# Altium PCB PCB1.PcbDoc
Units mm, origin at the board's own origin, x right, y up, seen from the top; angles counter-clockwise.
Board outline 43.05 x 55.55 mm, 4 copper layers (SignalTop, Ground, Power, SingalBottom), stack 1.566 mm thick; 65 components, 56 nets, 231 pads, 112 vias.
Unrouted connection lines stored in the file: 3.
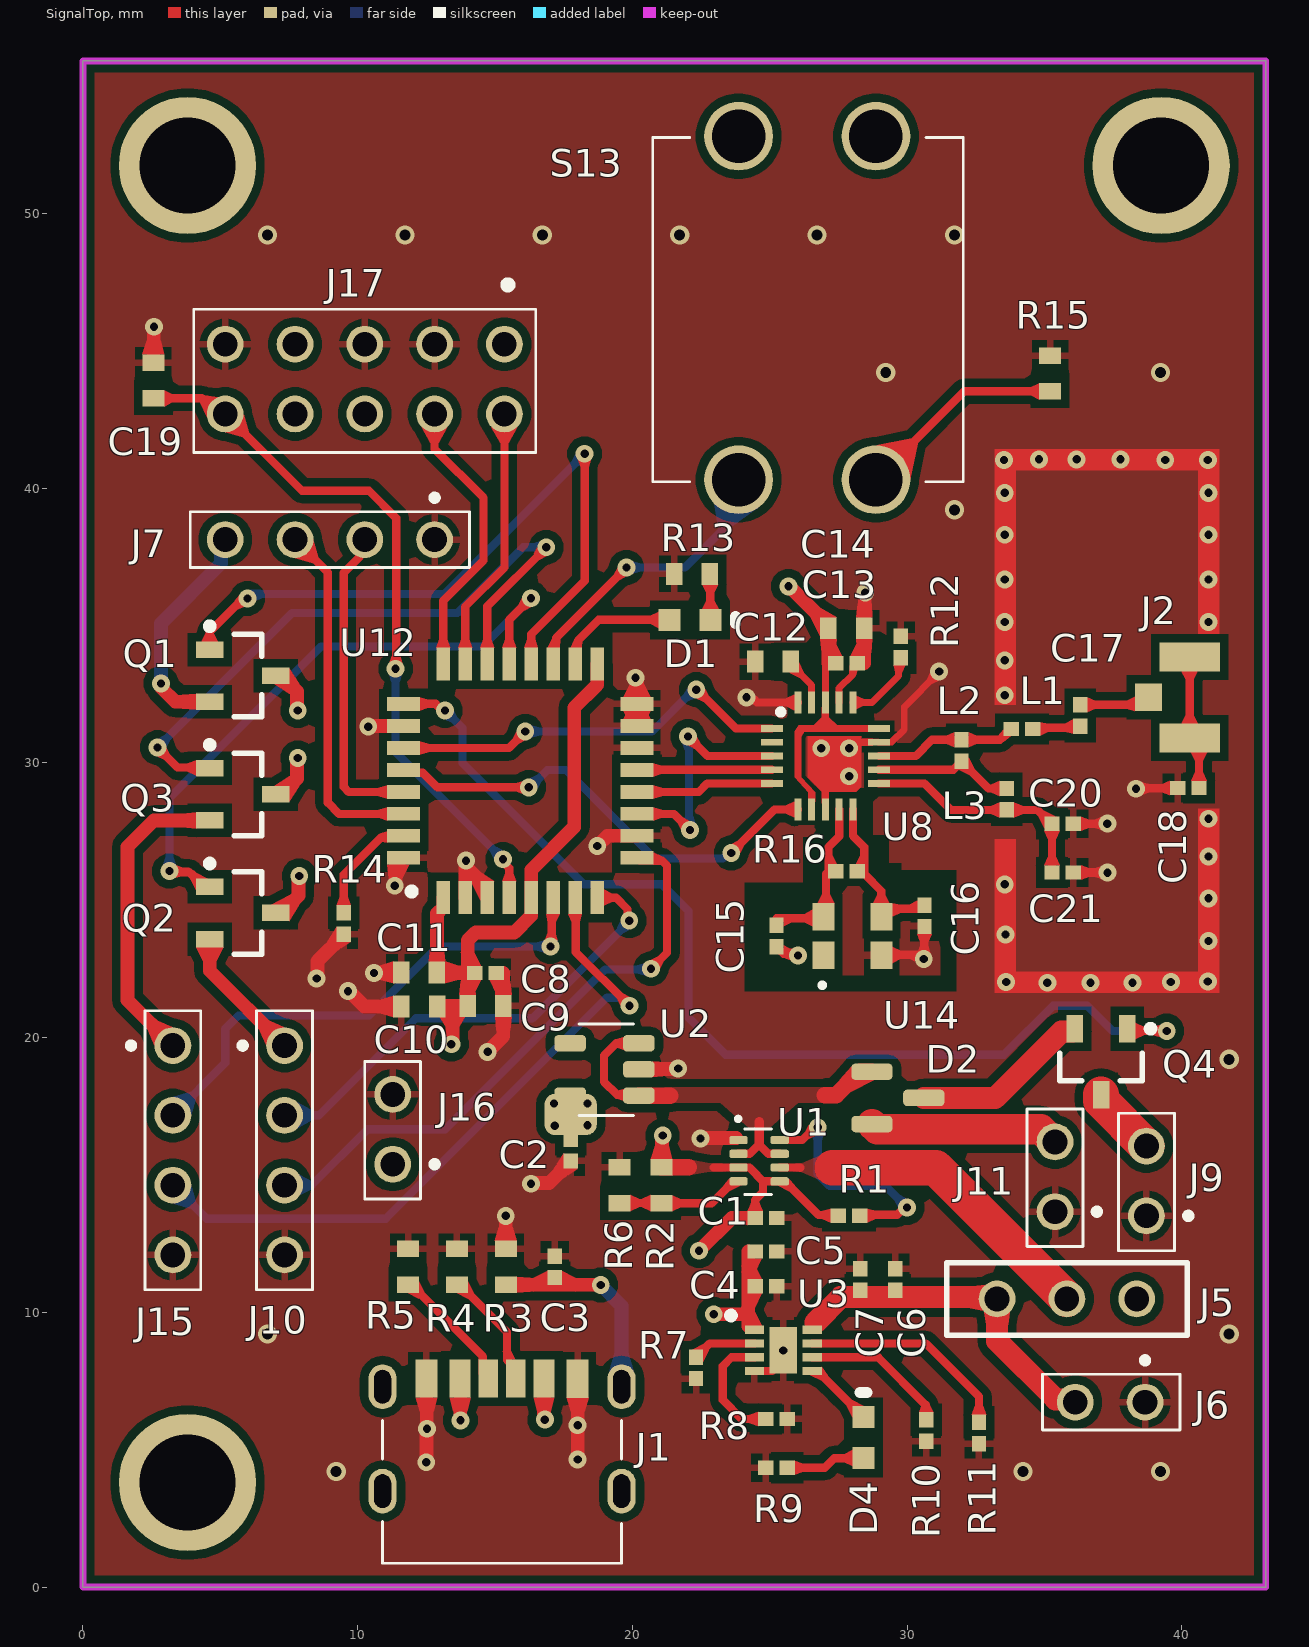
[diagram p0: SignalTop view]
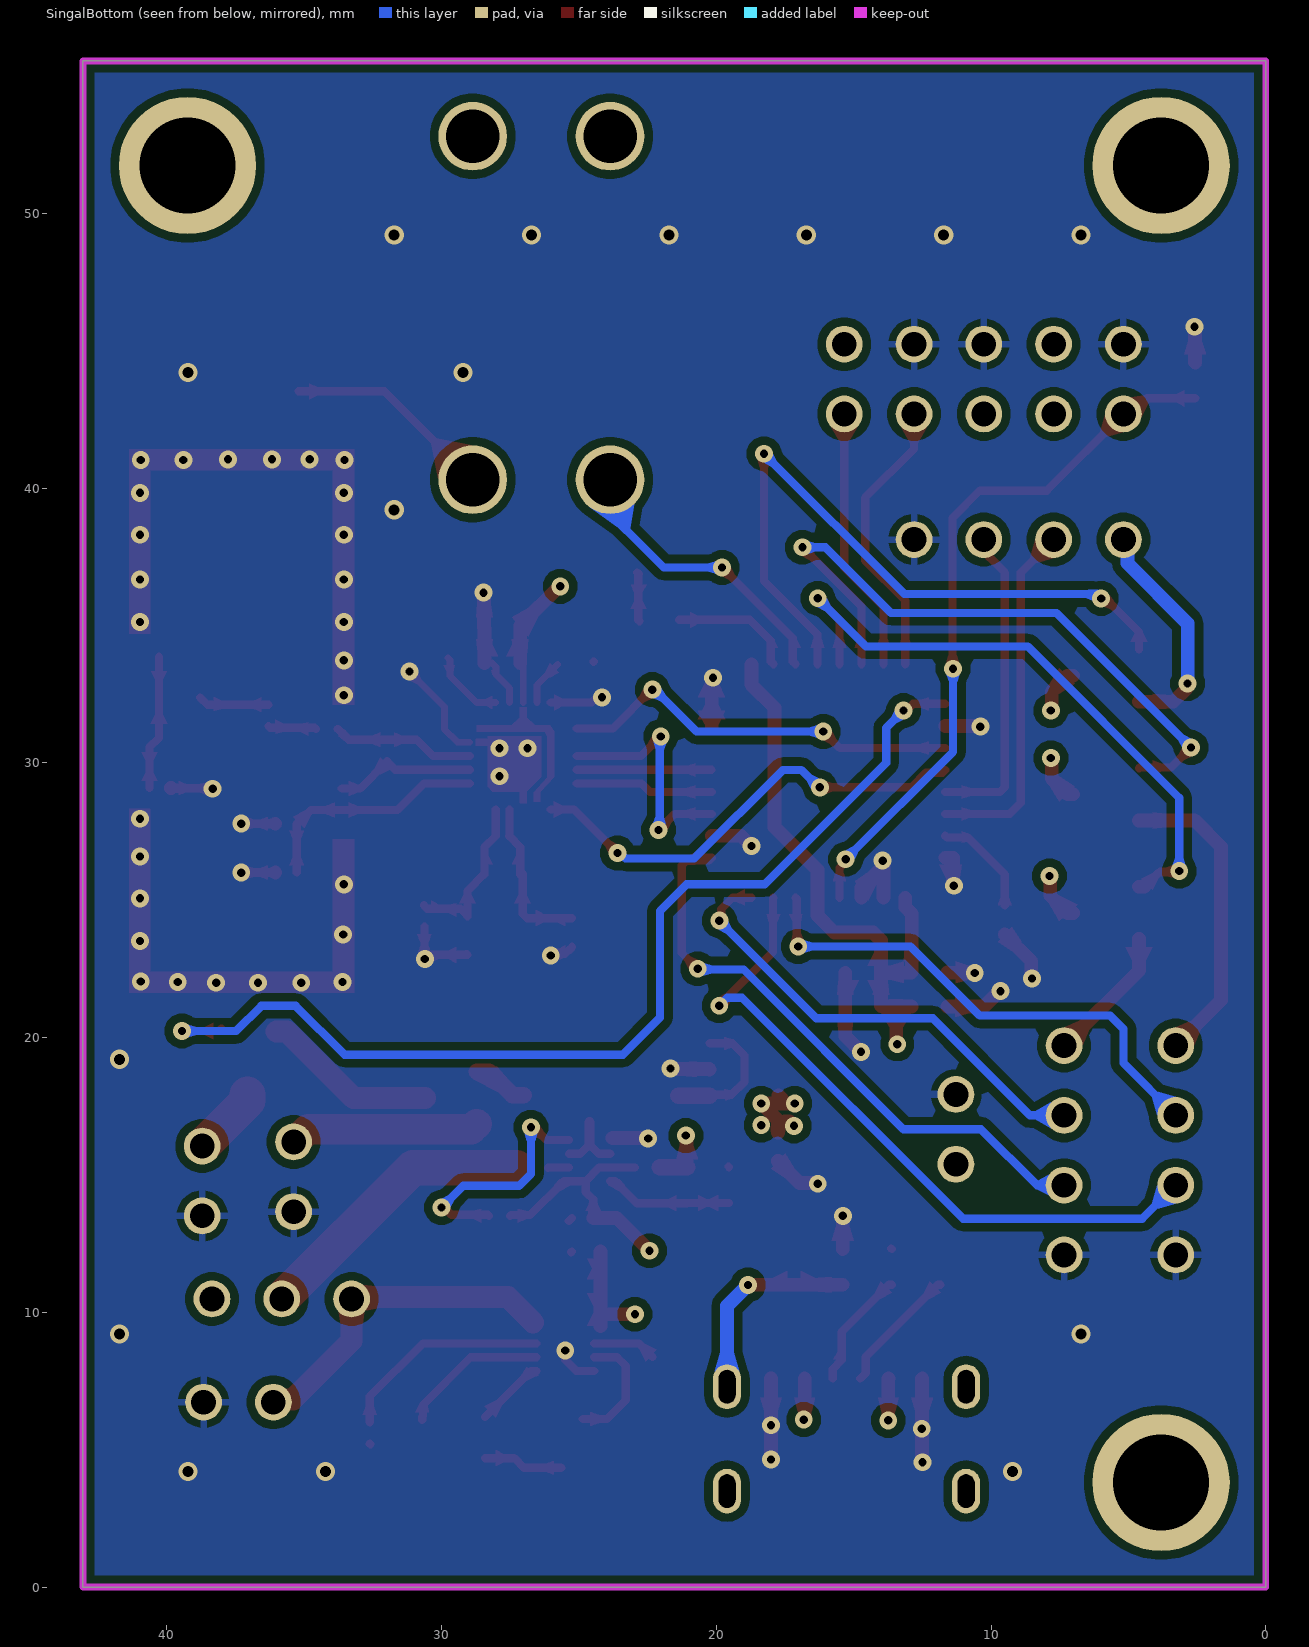
[diagram p1: SingalBottom view, seen from below]
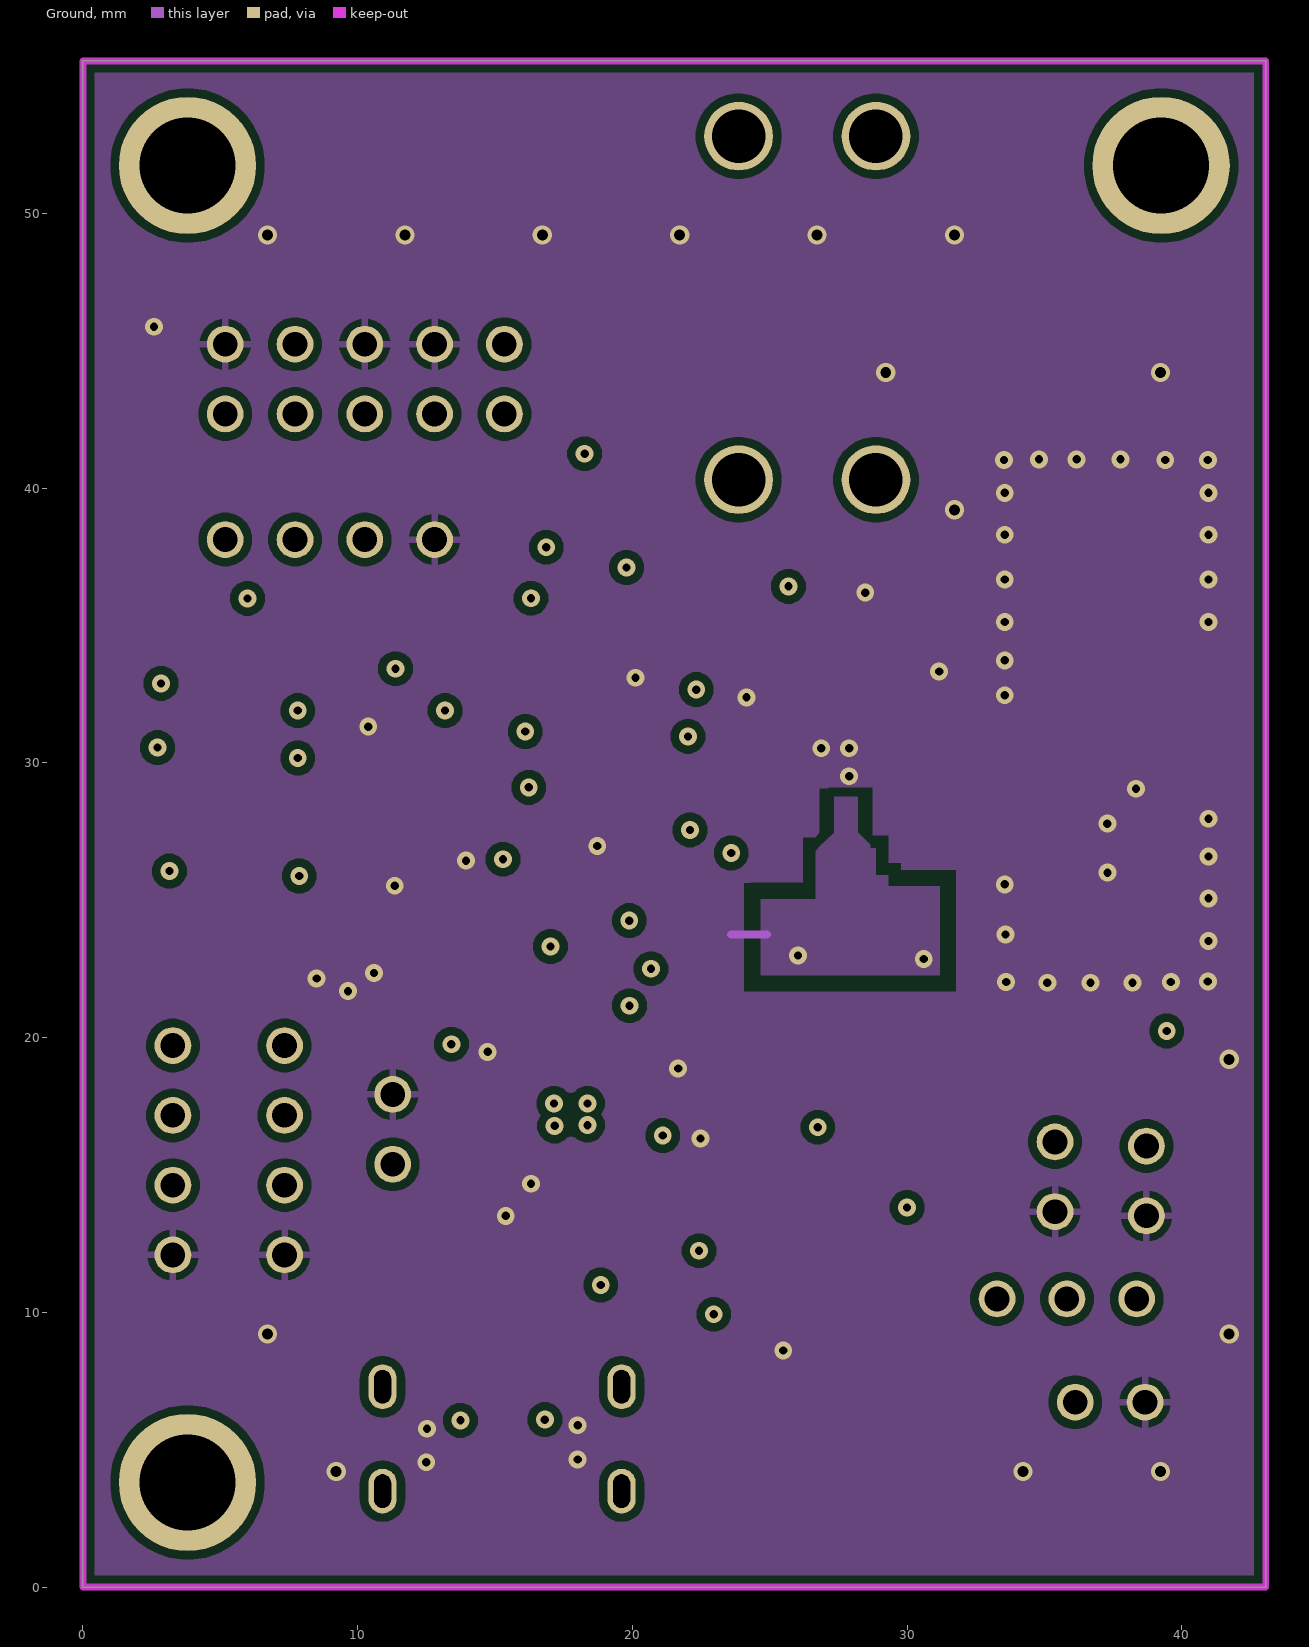
[diagram p2: Ground]
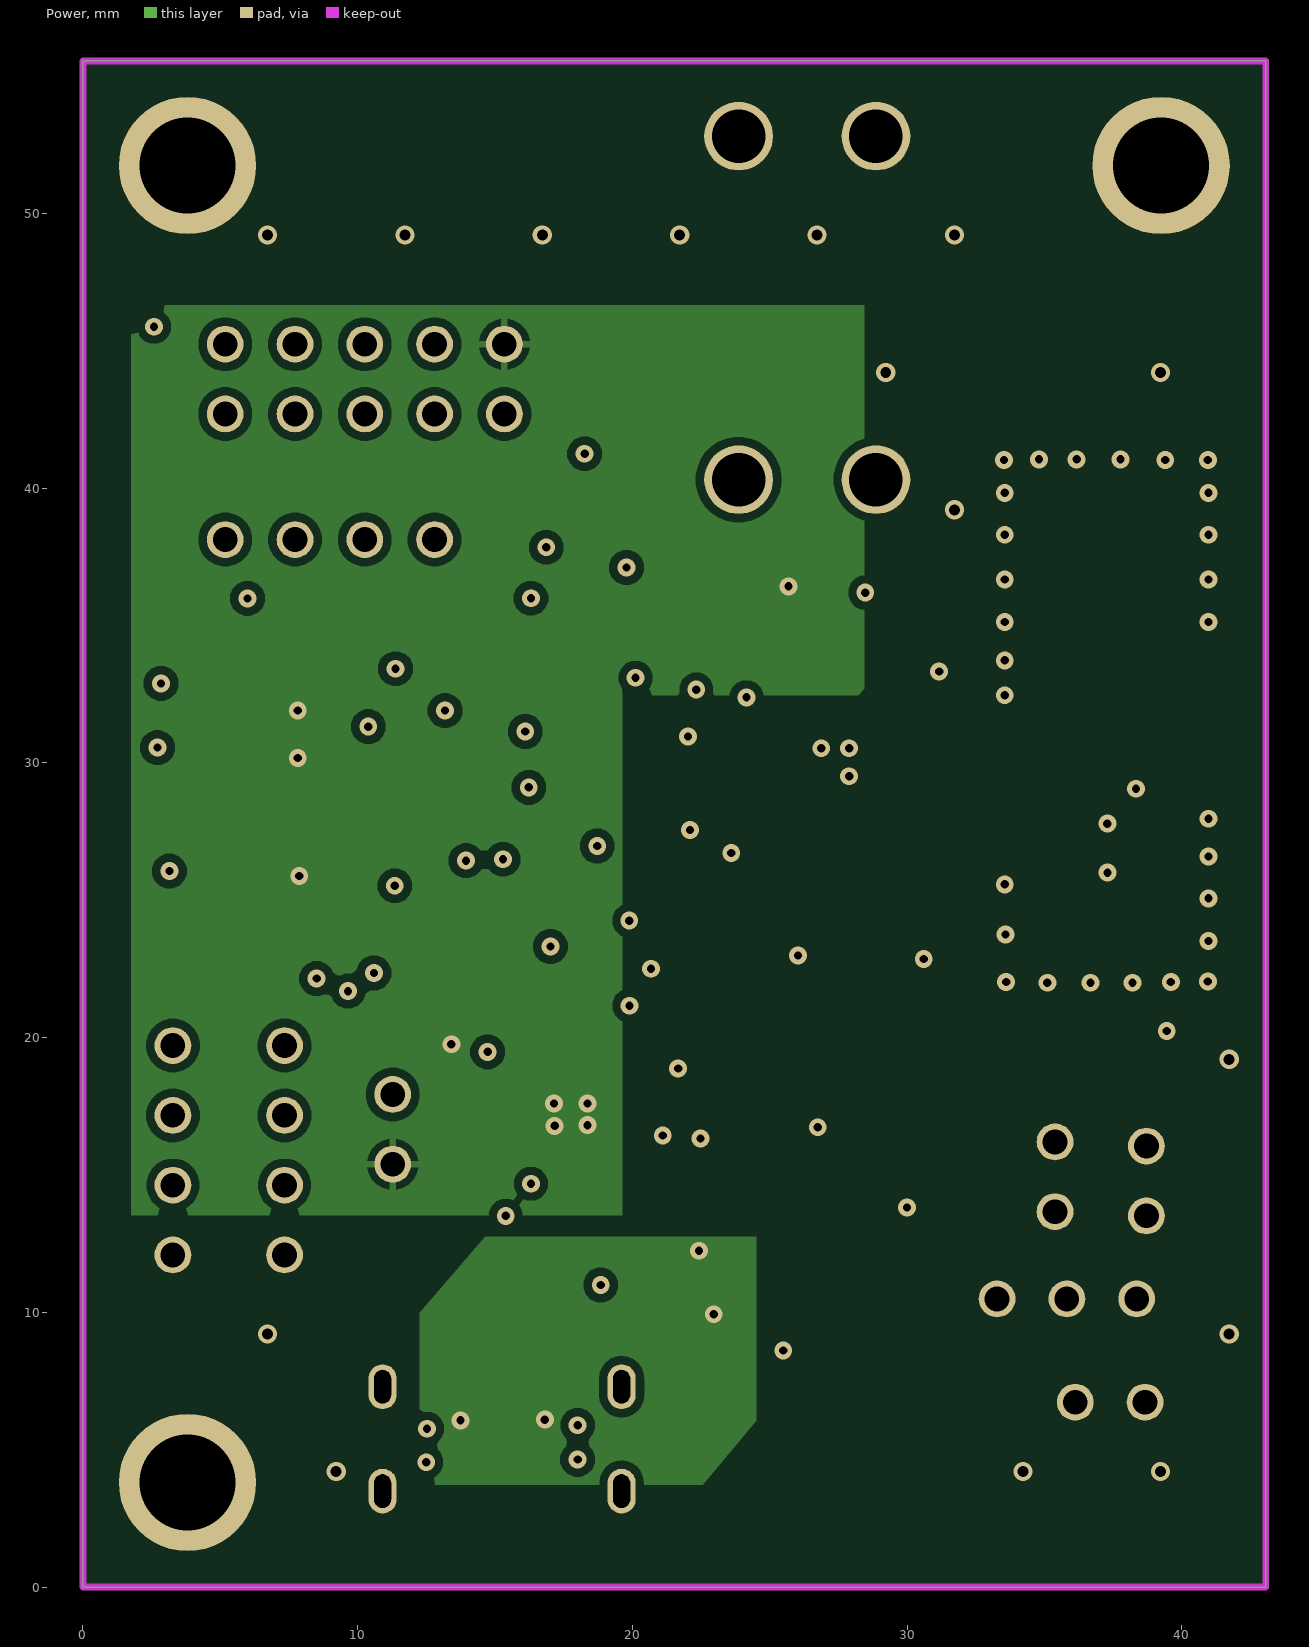
[diagram p3: Power]

## Layer stack, top to bottom
Top Solder: solder mask 0.03, Solder Resist, Dk 3.8
SignalTop: signal copper 0.035
Dielectric 2: prepreg 0.203, PP-022, Dk 4.4
Ground: signal copper 0.03
Dielectric 1: core 1.03, FR-4, Dk 4.6
Power: signal copper 0.03
Dielectric 3: prepreg 0.203, PP-022, Dk 4.4
SingalBottom: signal copper 0.035
Bottom Solder: solder mask 0.03, Solder Resist, Dk 3.8

## Board outline
0,0 0,55.55 43.053,55.55 43.053,0

## Design rules (kind name [scope] priority, off if disabled: settings)
Clearance Clearance_Silk [IsPad vs (OnLayer('Top Overlay'))] p1: gap=0.15 ignorepadtopadclearanceinfootprint=FALSE
Clearance Clearance_ViaToTrack [IsVia vs IsPad] p2: gap=0.2 ignorepadtopadclearanceinfootprint=FALSE
Clearance Clearance_HTH [IsVia vs IsVia] p3: gap=0 ignorepadtopadclearanceinfootprint=FALSE
Clearance ClearanceNRF [InComponent('U8')] p4: gap=0.15 ignorepadtopadclearanceinfootprint=FALSE
Clearance ClearanceU1 [(InComponent('U1') AND InNet('GND')) vs InNamedPolygon('NETD2_1_L01_P000')] p5: gap=0.05 ignorepadtopadclearanceinfootprint=TRUE
Clearance ClearanceU1_1 [(InComponent('U1') AND InNet('NetR1_2')) vs InNamedPolygon('NETD2_1_L01_P000')] p6: gap=0.05 ignorepadtopadclearanceinfootprint=TRUE
Clearance ClearanceU1_2 [InNet('NetD2_1') vs InNamedPolygon('NETD2_1_L01_P000')] p7: gap=0.01 ignorepadtopadclearanceinfootprint=TRUE
Clearance Clearance_AC_IN [InNetClass('AC_IN')] p8: gap=2 ignorepadtopadclearanceinfootprint=FALSE
Clearance Clearance_OTWORY_MONTAZOWE [InPadClass('OTWORY_MONTAZOWE')] p9: gap=0.3 ignorepadtopadclearanceinfootprint=FALSE
Clearance Clearance_POLYGON [InPolygon] p10: gap=0.3 ignorepadtopadclearanceinfootprint=FALSE
Clearance Clearance_KEEPOUT_ELECTRICAL [OnLayer('Keep-Out Layer')] p11: gap=0.25 ignorepadtopadclearanceinfootprint=FALSE
Clearance [All] p12: gap=0.178 ignorepadtopadclearanceinfootprint=FALSE
HoleSize [All] p1: absolutevalues=TRUE maxlimit=4 minlimit=0.025 maxpercent=80.000 minpercent=20.000
HoleToHoleClearance [All] p1: gap=0.127 allowstackedmicrovias=TRUE
MinimumSolderMaskSliver [All] p1: minsoldermaskwidth=0.076
PolygonConnect PolygonConnect_C61 [InNet('NetC6_1')] p1: thpad.connectstyle=Relief thpad.reliefconductorwidth=0.254 thpad.reliefentries=4 thpad.polygonreliefangle="90 Angle" thpad.airgapwidth=0.254 smdpad.connectstyle=Direct smdpad.reliefconductorwidth=0.254 smdpad.reliefentries=4 smdpad.polygonreliefangle="90 Angle" smdpad.airgapwidth=0.254 via.connectstyle=Relief via.reliefconductorwidth=0.254 via.reliefentries=4 via.polygonreliefangle="90 Angle" via.airgapwidth=0.254
PolygonConnect PolygonNETD21 [(InComponent('U2') AND InNet('NetD2_1')) vs InNamedPolygon('NETD2_1_L01_P000')] p2: thpad.connectstyle=Relief thpad.reliefconductorwidth=0.254 thpad.reliefentries=4 thpad.polygonreliefangle="90 Angle" thpad.airgapwidth=0.254 smdpad.connectstyle=Direct smdpad.reliefconductorwidth=0.254 smdpad.reliefentries=4 smdpad.polygonreliefangle="90 Angle" smdpad.airgapwidth=0.254 via.connectstyle=Relief via.reliefconductorwidth=0.254 via.reliefentries=4 via.polygonreliefangle="90 Angle" via.airgapwidth=0.254
PolygonConnect [All] p3: thpad.connectstyle=Relief thpad.reliefconductorwidth=0.5 thpad.reliefentries=4 thpad.polygonreliefangle="90 Angle" thpad.airgapwidth=0.254 smdpad.connectstyle=Relief smdpad.reliefconductorwidth=0.254 smdpad.reliefentries=4 smdpad.polygonreliefangle="90 Angle" smdpad.airgapwidth=0.254 via.connectstyle=Direct via.reliefconductorwidth=0.254 via.reliefentries=4 via.polygonreliefangle="90 Angle" via.airgapwidth=0.254
RoutingVias RoutingVias_POWER [InNetClass('POWER')] p1: holewidth=0.4 width=0.7 viastyle="Through Hole" minholewidth=0.3 minwidth=0.65 maxholewidth=0.6 maxwidth=1.1
RoutingVias [All] p2: holewidth=0.3 width=0.65 viastyle="Through Hole" minholewidth=0.3 minwidth=0.65 maxholewidth=0.4 maxwidth=0.75
SilkToSilkClearance [All] p1: silktosilkclearance=0.127
SilkToSolderMaskClearance [IsPad] p1: minsilkscreentomaskgap=0.127 clearancetoexposedcopper=TRUE
SolderMaskExpansion [All] p1: expansion=0.102 istentingtop=FALSE
UnRoutedNet [All] p1: checkbadconnections=TRUE
Width Width_BATTCHG [All] p1: maxlimit=3 minlimit=0.1 preferedwidth=0.8
Width Width_PELT [InNetClass('PELT')] p2: maxlimit=3 minlimit=2 preferedwidth=2.5
Width Width_POWER [InNetClass('POWER5V')] p3: maxlimit=0.5 minlimit=0.254 preferedwidth=0.5
Width [All] p4: maxlimit=0.3 minlimit=0.254 preferedwidth=0.3
24 further rules are at their usual default settings.

## Components (designator, comment, footprint, x,y, rotation, side; value= is the part's Value field where it differs from the comment)
C1 "1u" 0402 24.867,13.437 r0 top value="10,000 pF"
C2 "1u" 0402 17.755,15.9 r270 top value="10,000 pF"
C3 "10n" 0402 17.17,11.659 r90 top value="10,000 pF"
C4 "10n" 0402 24.867,10.947 r0 top value="10,000 pF"
C5 "1u" 0402 24.867,12.217 r0 top value="10,000 pF"
C6 "1u" 0402 29.566,11.201 r90 top value="10,000 pF"
C7 "10n" 0402 28.296,11.201 r90 top value="10,000 pF"
C8 "1u" 0402 14.654,22.352 r0 top value="10,000 pF"
C9 "100n" 0603 14.654,21.158 r0 top value="10,000 pF"
C10 "100n" 0603 12.245,21.133 r180 top value="10,000 pF"
C11 "100n" 0603 12.238,22.375 r180 top value="10,000 pF"
C12 "33n" 0603 25.121,33.68 r180 top value="10,000 pF"
C13 "1u" 0402 27.788,33.63 r180 top value="10,000 pF"
C14 "100n" 0603 27.788,34.9 r180 top value="10,000 pF"
C15 "22p" 0402 25.248,23.698 r270 top value="10,000 pF"
C16 "22p" 0402 30.632,24.435 r270 top value="10,000 pF"
C17 "1p5" 0402 36.297,31.725 r270 top value="10,000 pF"
C18 "1p" 0402 40.234,29.083 r180 top value="10,000 pF"
C19 "100n" 0603 2.565,43.917 r90 top value="10,000 pF"
C20 "2n2" 0402 35.662,27.788 r0 top value="10,000 pF"
C21 "4p7" 0402 35.662,26.01 r0 top value="10,000 pF"
D1 "LED" LIGHT_DIODE 22.098,35.204 r0 top
D2 "DUO_DIODE" DUO_DIODE 29.663,17.807 r0 top
D4 "LIGHT_DIODE" LIGHT_DIODE 28.415,5.442 r90 top (schematic designator U4)
J1 "USBC" USB_C 15.257,5.543 r0 top
J2 "UFL_ANTENA" UFL_ANTENA 39.534,32.383 r270 top
J5 "SWITCH3PIN" SWITCH 35.814,10.49 r0 top (schematic designator U5)
J6 "BATT_CONN" 2_54X2 37.389,6.731 r180 top (schematic designator U6)
J7 "I2C_CONN" 2_54X4 8.992,38.125 r180 top (schematic designator U7)
J9 "PETLIER_TEC" 2_54X2 38.71,14.783 r90 top (schematic designator U9)
J10 "GPS_CONN" 2_54X4 7.341,15.9 r270 top (schematic designator U10)
J11 "PETLIER_TEG" 2_54X2 35.382,14.935 r90 top (schematic designator U11)
J15 "ADC_CONN" 2_54X4 3.277,15.9 r270 top (schematic designator U15)
J16 "VCC_CONN" 2_54X2 11.278,16.662 r90 top (schematic designator U16)
J17 "SWD2x5" SWD2X5 10.262,43.967 r270 top (schematic designator U17)
L1 "3n9" 0402 34.177,31.229 r0 top
L2 "8n2" 0402 31.979,30.455 r270 top
L3 "2n7" 0402 33.63,28.677 r270 top
Q1 "PMOS" SOT95P245X112-3N 5.817,33.172 r0 top
Q2 "PMOS" SOT95P245X112-3N 5.817,24.536 r0 top
Q3 "PMOS" SOT95P245X112-3N 5.817,28.854 r0 top
Q4 "PMOS" SOT95P245X112-3N 37.059,19.126 r270 top
R1 "10k" 0402 27.889,13.513 r0 top
R2 "1k" 0603 21.057,14.63 r90 top
R3 "1M" 0603 15.392,11.659 r270 top
R4 "5.1k" 0603 13.614,11.659 r270 top
R5 "5.1k" 0603 11.836,11.659 r270 top
R6 "2k" 0603 19.533,14.63 r270 top
R7 "600" 0402 22.319,7.982 r90 top
R8 "10k" 0402 25.248,6.121 r180 top
R9 "10k" 0402 25.248,4.343 r0 top
R10 "15k" 0402 30.701,5.696 r90 top
R11 "15k" 0402 32.614,5.613 r90 top
R12 "22k" 0402 29.769,34.214 r270 top
R13 "2k2" 0603 22.174,36.881 r0 top
R14 "10k" 0402 9.5,24.155 r270 top
R15 "1M" 0603 35.204,44.171 r90 top
R16 "22k" 0402 27.788,26.06 r0 top
S13 "FSM100" FSM100 26.365,46.558 r90 top (schematic designator U13)
U1 "TPS2117" TPS2117 24.613,15.519 r0 top
U2 "ADP160" ADP160 18.986,18.843 r180 top
U3 "BQ25172DSGR" BQ25172 25.494,8.617 r0 top
U8 "nRF24L01P" NRF24L01P 27.026,30.251 r0 top
U12 "STM32L071KBT6" STM32L0 15.918,29.343 r0 top
U14 "OSCILATOR" OSCILATOR 28.016,23.698 r0 top

## Footprints (in the part's own frame and the unit in brackets; to place one, negate y for a bottom-side part, rotate by r counter-clockwise, add the part's x,y. Pads: shape width x height; smd on the part's side, far side on the other; paste and mask are expansions set on the pad)
2_54X2 [mm]
  round 1.34 hole 0.9: 1(-1.27,0) 2(1.27,0)
  silkscreen extent -2.54,-1.62 2.47,1.02
2_54X4 [mm]
  round 1.34 hole 0.9: 1(-3.81,0) 2(-1.27,0) 3(1.27,0) 4(3.81,0)
  silkscreen extent -5.08,-1.62 5.08,1.02
0402 [mm]
  rect 0.56x0.52 smd: 1(-0.39,0) 2(0.39,0)
  body extent -0.53,-0.27 0.53,0.28, height 0.55
0603 [mm] "Chip Capacitor, 2-Leads, Body 1,00x0,50mm, IPC Medium Density"
  rect 0.6x0.8 smd: 1(-0.65,0) 2(0.65,0)
  body extent -0.85,-0.45 0.85,0.45, height 0.55
ADP160 [mm]
  rrect50% 1.15x0.6 smd: 1(-1.25,0.95) 2(-1.25,0) 3(-1.25,-0.95) 4(1.25,0.95) 5(1.25,-0.95)
  silkscreen extent -1.05,-1.65 0.92,1.68
BQ25172 [mm]
  rect 0.7x0.3 smd: 1(-1.05,0.75) 2(-1.05,0.25) 3(-1.05,-0.25) 4(-1.05,-0.75) 5(1.05,-0.75) 6(1.05,-0.25) 7(1.05,0.25) 8(1.05,0.75)
  rect 1x1.7 smd: 4(0,0)
  silkscreen extent -2.03,1.15 -1.78,1.39
DUO_DIODE [mm]
  rrect50% 1.5x0.6 smd: 1(-0.944,0.953) 2(-0.944,-0.953) 3(0.944,-0.002)
FSM100 [mm]
  round 2.5 hole 1.95: 1(-6.25,2.5) 2(6.25,2.5) 3(-6.25,-2.5) 4(6.25,-2.5)
  silkscreen extent -6.32,-5.68 6.2,5.63
LIGHT_DIODE [mm]
  rect 0.8x0.8 smd: 1(-0.75,0) 2(0.75,0)
  silkscreen extent 1.65,-0.13 1.65,0.13, body extent -0.8,-0.4 0.8,0.4, height 0.9
NRF24L01P [mm]
  rect 0.8x0.25 smd: 1(-1.95,1) 2(-1.95,0.5) 3(-1.95,0) 4(-1.95,-0.5) 5(-1.95,-1) 11(1.95,-1) 12(1.95,-0.5) 13(1.95,0) 14(1.95,0.5) 15(1.95,1)
  rect 0.25x0.8 smd: 6(-1,-1.95) 7(-0.5,-1.95) 8(0,-1.95) 9(0.5,-1.95) 10(1,-1.95) 16(1,1.95) 17(0.5,1.95) 18(0,1.95) 19(-0.5,1.95) 20(-1,1.95)
  SignalTop region: -0.125,-1.725 0.125,-1.725 0.125,-1.55 0.125,-1.5 0.125,-1.125 -0.125,-1.275
  SignalTop region: -0.875,0.7 -0.775,0.875 -0.775,1.125 -0.975,1.125 -1.125,0.9 -1.125,0.7
  SignalTop region: 1.3,0.725 1.3,-1.125 1.125,-1.3 -0.125,-1.3 -0.65,-0.775 -0.65,-0.75 -0.65,0.725
  SignalTop region: -0.625,-1.325 -0.375,-1.325 -0.875,-0.775 -1.125,-0.775
  SignalTop region: -1.125,-0.775 -1.125,0.7 -0.875,0.7 -0.875,-0.775
  SignalTop region: -0.625,-1.325 -0.625,-1.675 -0.375,-1.675 -0.375,-1.325
  SignalTop region: -0.125,1.1 -0.125,1.775 0.125,1.775 0.125,1.1
  SignalTop region: 0.375,1.1 0.45,1.1 0.125,1.4 0.125,1.1
  SignalTop region: -0.375,1.1 -0.45,1.1 -0.125,1.4 -0.125,1.1
  SignalTop region: 1.7,0.875 -0.775,0.875 -0.775,1.125 1.7,1.125
  SignalTop region: 1.725,0.375 1.725,0.625 1.55,0.625 1.5,0.625 1.125,0.625 1.275,0.375
  SignalTop lines w0.25: 0,1.95 0,1.95
  silkscreen extent -1.68,1.54 -1.57,1.66
OSCILATOR [mm]
  rect 0.8x1 smd: 1(-1.054,-0.699) 2(1.054,-0.699) 3(1.054,0.699) 4(-1.054,0.699)
  silkscreen extent -1.13,-1.82 -1.08,-1.77
SOT95P245X112-3N [mm] "SOT23, 3-Leads, Body 2,90x2,45mm, Pitch 0,95mm, IPC Medium Density"
  rect 1x0.6 smd: 1(-1.2,0.95) 2(-1.2,-0.95) 3(1.2,0)
  silkscreen extent -1.32,-1.5 0.7,1.92, body extent -0.7,-1.5 0.7,1.5, height 1.12
STM32L0 [mm]
  rect 0.5x1.2 smd: 1(-2.8,-4.25) 2(-2,-4.25) 3(-1.2,-4.25) 4(-0.4,-4.25) 5(0.4,-4.25) 6(1.2,-4.25) 7(2,-4.25) 8(2.8,-4.25) 17(2.8,4.25) 18(2,4.25) 19(1.2,4.25) 20(0.4,4.25) 21(-0.4,4.25) 22(-1.2,4.25) 23(-2,4.25) 24(-2.8,4.25)
  rect 1.2x0.5 smd: 9(4.25,-2.8) 10(4.25,-2) 11(4.25,-1.2) 12(4.25,-0.4) 13(4.25,0.4) 14(4.25,1.2) 15(4.25,2) 16(4.25,2.8) 25(-4.25,2.8) 26(-4.25,2) 27(-4.25,1.2) 28(-4.25,0.4) 29(-4.25,-0.4) 30(-4.25,-1.2) 31(-4.25,-2) 32(-4.25,-2.8)
  silkscreen extent -4.06,-4.13 -3.84,-3.92
SWD2X5 [mm]
  round 1.34 hole 0.9: 1(-1.27,5.08) 2(1.27,5.08) 3(-1.27,2.54) 4(1.27,2.54) 5(-1.27,0) 6(1.27,0) 7(-1.27,-2.54) 8(1.27,-2.54) 9(-1.27,-5.08) 10(1.27,-5.08)
  silkscreen extent -3.56,-6.22 2.67,6.22
SWITCH [mm]
  round 1.34 hole 0.9: 1(-2.54,0) 2(0,0) 3(2.54,0)
  silkscreen extent -4.38,-1.33 4.38,1.33
TPS2117 [mm]
  rrect50% 0.67x0.3 smd mask+0.051: 1(-0.75,0.75) 2(-0.75,0.25) 3(-0.75,-0.25) 4(-0.75,-0.75) 5(0.75,0.75) 6(0.75,0.25) 7(0.75,-0.25) 8(0.75,-0.75)
  silkscreen extent -0.84,-1.22 0.45,1.6
UFL_ANTENA [mm]
  rect 1x1 smd: 1(0,-0.75)
  rect 1.05x2.2 smd: 2(-1.475,0.75) 2(1.475,0.75)
USB_C [mm]
  rect 0.7x1.4 smd: A5(-0.5,2.05) B5(0.5,2.05)
  rect 0.76x1.4 smd: A9(1.525,2.05) B9(-1.525,2.05)
  rect 0.8x1.4 smd: A12(2.752,2.049) B12(-2.752,2.05)
  oval 1.03x1.63 hole 0.62 slot 1.22 at 90 deg: SHIELD(-4.35,-2.05) SHIELD(-4.35,1.75) SHIELD(4.35,-2.05) SHIELD(4.35,1.75)
  silkscreen extent -4.35,-4.67 4.35,0.53

## Part data
C1 C2 C3 C4 C5 C6 C7 C8 C9 C10 C11 C12 C13 C14 C15 C16 C17 C18 C19 C20 C21: library part CAP10nF, "CAP CER 10000PF 10V X7R 0402", Capacitance="10,000 pF", Manufacturer=Kemet, Manufacturer Part Number=C0402C103M8RACTU, Package=C0402-BB, Temperature="-55°C to +125°C", Temperature Characteristic=X7R, Temperature Coefficient=15%, Temperature Range High=+125°C, Temperature Range Low=-55°C, Tolerance=0.2, Voltage Rating="10 V", Automotive=No, Category=Cap, ComponentLink2Description=Datasheet, ComponentLink2URL=https://content.kemet.com/datasheets/KEM_C1002_X7R_SMD.pdf, Device Class L1="Passive Components", Device Class L2=Capacitors, Device Class L3="Ceramic Capacitors", Digikey Description="CAP CER 10000PF 10V X7R 0402", Height=0.55mm, Ipc Land Pattern Name=CAPC10050X50, Lead Free=Yes, Material=Ceramic, Mouser Description="Multilayer Ceramic Capacitors MLCC - SMD/SMT 10volts 10000pF X7R 20%", Octopart=https://octopart.com/c0402c103m8ractu-kemet-12595671, RoHS=TRUE
D1: library part LIGHT_DIODE
J6 J9 J11 J16: library part 2_54x2
J7 J10 J15: library part 2_54x4
L1 L2 L3: library part INDUCTOR
R1 R2 R3 R4 R5 R6 R7 R8 R9 R10 R11 R12 R13 R14 R15 R16: library part REZYSTOR

## Free pads (board coordinates)
  rrect50% 1.9x1.5 smd: 1(17.755,17.205)
  round 5 hole 3.5: 3.5/5(3.81,3.81) 3.5/5(3.81,51.74) 3.5/5(39.243,51.74)

## Via types
v1: diameter 0.65, hole 0.3, SignalTop to SingalBottom, 97 vias
v2: diameter 0.7, hole 0.4, SignalTop to SingalBottom, tented both sides, 15 vias

## Nets (pads, with @x,y where several pads share a name; then routed paths per layer and width w, separated by ;. In a path a pad name is that pad's centre, name@x,y a point inside that pad or via, vN(x,y) a via of type N, cw(c..) or ccw(c..) an arc to the next point about the centre after c; other vN are vias at no path point)
3V3BUS: C2.1 C8.1 C9.1 C10.1 C11.1 C13.2 C14.2 J16.1 J17.1 pad.1 Q1.3 Q2.3 Q3.3 U2.4 U8.7 U8.15 U8.18 U12.1 U12.5 U12.17 | length 35.4
  SignalTop w0.25: U8.18 27.026,33.518 C13.2@27.138,33.63
  SignalTop w0.5: Q2.3 7.217,24.536 7.845,25.165 7.845,25.854 v1(7.874,25.883) ; Q3.3 7.217,28.854 7.795,29.432 7.795,30.147 v1(7.823,30.175) ; Q1.3 7.217,33.172 7.795,32.595 7.795,31.931 v1(7.823,31.902) ; C10.1 12.907,21.145 13.449,21.145 ; U12.1 13.118,24.743 12.888,24.514 C11.1 12.9,22.364 13.992,22.364 C8.1@14.004,22.352 ; v1(13.411,19.761) 13.44,19.79 13.44,19.896 13.449,19.905 13.449,21.145 ; v1(17.145,17.602) 17.357,17.602 17.36,17.599 17.364,17.602 v1(18.364,17.602) 17.755,16.993 C2.1@17.755,16.55 ; v1(17.17,16.789) 17.326,16.945 pad.1@17.495,16.945 ; pad.1@17.436,17.593 U2.4 17.745,17.883 pad.1@17.745,17.669 ; U12.17 18.718,32.84 17.882,32.004 17.882,27.663 16.318,26.099 16.318,24.438 15.704,23.825 14.297,23.825 14.004,23.532 C8.1@14.004,22.352 ; v1(25.679,36.424) 25.714,36.424 27.138,35 C14.2 C13.2@27.138,33.63 ; 13.449,21.145 13.991,21.145 C9.1 C8.1@14.004,22.352
  other v1: 18.364,16.815
5VBUS: C1.1 C4.1 C5.1 J1.A9 J1.B9 R1.1 R2.2 U1.3 U1.8 U3.1 | length 18.2
  SignalTop w0.3: 22.958,15.269 U1.3 24.267,15.269 24.525,15.011 24.525,14.997 24.753,14.769 ; C1.1 24.477,14.113 24.753,14.39 24.753,14.769 ; U1.8@25.248,14.769 24.753,14.769 ; U1.8 25.548,14.769 26.772,13.545 27.467,13.545 R1.1
  SignalTop w0.5: J1.B9 13.737,7.589 13.737,6.075 v1(13.741,6.071) ; J1.A9 16.782,6.169 16.815,6.137 v1(16.815,6.096) ; R2.2 21.082,15.306 21.082,16.408 v1(21.107,16.434) ; v1(22.428,12.243) 23.622,13.437 C1.1 ; v1(22.962,9.931) 24.09,9.931 ; U3.1@24.217,9.5 C5.1@24.217,12.217
  SignalTop w0.6: R2.2 22.058,15.28
CC1: J1.A5 R5.2 | length 4.7
  SignalTop w0.3: R5.2 11.936,11.009 14.557,8.388 14.557,7.793 J1.A5
CC2: J1.B5 R4.2 | length 4.4
  SignalTop w0.3: R4.2 13.714,11.009 15.435,9.288 15.435,8.265 15.757,7.943 J1.B5
GND: C1.2 C2.2 C3.2 C4.2 C5.2 C6.2 C7.2 C8.2 C9.2 C10.2 C11.2 C12.2 C13.1 C14.1 C15.2 C16.2 C18.2 C19.2 C20.2 C21.2 J1.A12 J1.B12 J6.1 J7.1 J9.1 J10.4 J11.1 J15.4 J16.2 J17.3 J17.5 J17.9 R3.1 R4.1 R5.1 R6.1 R7.1 R8.1 R9.1 R10.1 R11.1 R12.1 R13.1 R14.2 R15.2 U1.1 U2.2 U3.4 U8.8 U8.14 U8.17 U8.20 U12.2 U12.3 U12.10 U12.14 U12.15 U12.16 U12.26 U12.32 U14.2 | length 50.6
  SignalTop w0.25: U8.17 27.526,32.718 28.023,33.215 28.023,33.495 28.158,33.63 C13.1 ; U8.14 29.425,30.751 29.896,31.222 29.896,32.029 v1@31.166,33.299
  SignalTop w0.3: R4.1 R4.1@13.627,12.321 ; R3.1@15.38,12.321 R3.1 ; R6.1 R6.1@19.558,15.306 ; v1(24.155,32.385) 24.222,32.318 24.419,32.318 24.535,32.201 U8.20 ; U3.4@24.444,7.867 25.094,7.867 U3.4@25.494,8.267 ; C12.2@24.458,33.693 C12.2 ; C15.2 25.248,23.288 25.358,23.178 25.378,23.178 25.502,23.054 25.957,23.054 v1(26.024,22.987) ; C5.2 C5.2@25.282,12.192 ; C1.2 C1.2@25.367,13.327 ; U14.2@29.093,23.048 29.058,23.012 30.36,23.012 30.512,22.86 v1(30.607,22.86) 30.62,22.873 C16.2@30.62,24.045 ; v1@31.166,33.299 v1(31.166,33.325) ; R11.1@32.588,5.198 R11.1 ; C20.2 v1(37.287,27.788) ; C21.2@36.055,26.007 v1@37.285,26.007 ; v1@38.344,29.073 C18.2@39.834,29.073
  SignalTop w0.5: C19.2 2.578,44.579 2.578,45.86 v1(2.591,45.872) ; v1(8.509,22.149) 8.538,22.177 8.538,22.783 9.5,23.745 R14.2 ; v1(9.652,21.692) 9.693,21.692 10.251,21.133 C10.2 ; v1(10.389,31.318) 10.414,31.343 U12.26 ; v1(10.592,22.352) 10.604,22.364 11.576,22.364 C11.2 ; v1(11.354,25.527) 11.382,25.556 11.382,26.543 U12.32 ; v1(12.497,4.547) 12.509,4.559 12.509,5.753 v1(12.522,5.766) 12.514,5.774 12.514,7.585 J1.B12 ; U12.2 13.918,26.414 v1(13.945,26.441) ; 14.075,26.086 14.718,25.443 U12.3 ; v1(14.732,19.482) 15.304,20.054 C9.2 C8.2@15.304,22.352 ; R3.1 v1(15.392,13.513) ; v1(16.307,14.681) 16.335,14.71 16.974,14.71 17.755,15.49 C2.2 ; v1(18.009,4.648) v1(18.009,5.893) J1.A12 ; v1(18.72,26.975) 19.088,27.343 U12.10 ; v1(20.117,33.096) 20.117,33.056 20.168,33.005 U12.16 U12.15 ; U2.2 20.25,18.858 21.652,18.858 v1(21.666,18.872) ; v1(22.479,16.332) 22.494,16.347 U1.1@23.778,16.347 ; C13.1@28.438,33.63 C14.1 28.455,34.917 28.455,36.177 v1(28.473,36.195) ; C21.2 C21.2@36.055,26.007 ; v1@37.285,26.007 v1(37.288,26.004) ; v1(38.329,29.058) v1@38.344,29.073 ; C18.2@39.834,29.073 C18.2
  Ground w0.3: 23.597,23.749 24.892,23.749
  other v1: 25.494,8.617 35.103,21.996 36.678,21.996 38.202,21.996 33.604,22.022 39.599,22.022 40.945,22.047 40.97,23.52 33.579,23.749 40.97,25.07 33.553,25.578 40.97,26.594 40.97,27.965 27.889,29.515 26.873,30.531 27.889,30.531 33.553,32.461 33.553,33.731 33.553,35.128 40.97,35.128 33.553,36.678 40.97,36.678 33.553,38.303 40.97,38.303 33.553,39.827 40.97,39.827 33.528,41.021 39.395,41.021 40.945,41.021 34.798,41.046 36.17,41.046 37.77,41.046
  other v2: 9.222,4.211 34.222,4.211 39.222,4.211 6.722,9.211 41.722,9.211 41.722,19.211 31.722,39.211 29.222,44.211 39.222,44.211 6.722,49.211 11.722,49.211 16.722,49.211 21.722,49.211 26.722,49.211 31.722,49.211
NetC6_1: C6.1 C7.1 J5.1 J6.2 U3.8 | length 12.2
  SignalTop w0.8: 26.664,9.633 27.582,10.551 C7.1@28.196,10.551 ; C7.1@28.296,10.551 29.566,10.551 33.213,10.551 J5.1 33.274,8.966 35.406,6.834 36.015,6.834 J6.2
NetC12_1: C12.1 U8.19 | length 1.7
  SignalTop w0.25: C12.1@25.771,33.58 26.526,32.825 U8.19
NetC15_1: C15.1 R16.1 U8.9 U14.4 | length 5.9
  SignalTop w0.3: C15.1@25.248,24.348 26.888,24.348 U14.4@26.949,24.409 ; U14.4@27.044,24.504 27.044,25.839 ; 27.044,25.966 27.044,25.839 ; U8.9 27.526,27.338 27.534,27.33 27.138,26.934 27.138,25.933 27.044,25.839
NetC16_1: C16.1 R16.2 U8.10 U14.3 | length 6.1
  SignalTop w0.3: U8.10 28.026,27.346 28.438,26.934 28.438,25.933 28.465,25.933 29.058,25.34 29.058,24.409 29.058,24.445 29.308,24.695 30.522,24.695 30.632,24.805 C16.1
NetC17_1: C17.1 J2.1 | length 2.6
  SignalTop w0.3: C17.1 38.516,32.115 J2.1
NetC17_2: C17.2 L1.2 | length 1.8
  SignalTop w0.3: L1.2 34.619,31.282 36.244,31.282 C17.2
NetC18_1: C18.1 J2.2 | length 4.9
  SignalTop w0.3: J2.2@40.284,33.858 40.284,30.908 40.624,30.569 C18.1
NetC19_1: C19.1 J17.10 U12.4 | length 26.2
  SignalTop w0.3: C19.1 4.331,43.267 4.9,42.697 J17.10 7.976,39.903 10.414,39.903 11.405,38.913 11.405,33.452 v1(11.379,33.426) ; v1(15.291,26.492) 15.291,26.397 15.518,26.171 U12.4
  SingalBottom w0.3: v1(11.379,33.426) 11.379,30.404 v1(15.291,26.492)
NetC20_1: C20.1 C21.1 L3.2 U8.11 | length 8.7
  SignalTop w0.3: U8.11 30.634,29.251 31.599,28.287 L3.2 34.753,28.287 35.252,27.788 C20.1 C21.1
NetD1_1: D1.1 U12.18 | length 4.5
  SignalTop w0.3: U12.18 18.018,33.693 18.018,34.451 18.771,35.204 D1.1
NetD1_2: D1.2 R13.2 | length 1.8
  SignalTop w0.3: D1.2@22.798,35.154 D1.2 22.836,35.216 22.836,36.869 R13.2 R13.2@22.874,36.931
NetD2_1: D2.1 U1.2 U1.6 U2.1 U2.3 | length 9.7
  SignalTop w0.3: U2.1 20.207,17.922 19.441,17.922 18.971,18.392 18.971,19.352 19.412,19.793 U2.3 ; U1.2 24.267,15.769 24.613,16.115 24.958,15.769 U1.6
  SignalTop w0.35: 24.613,16.115 24.613,16.942
  SignalTop w0.6: U2.1 21.387,17.893 ; 27,17.907 27.417,17.907 28.269,18.759 D2.1
NetD2_2: D2.2 J11.2 | length 6.9
  SignalTop w1.1: D2.2 28.911,16.662 34.86,16.662 35.317,16.205 J11.2
NetD2_3: D2.3 Q4.2 | length 6.4
  SignalTop w0.8: D2.3 33.202,17.805 35.623,20.226 Q4.2@36.009,20.226
NetL1_1: L1.1 L2.1 U8.13 | length 5.2
  SignalTop w0.3: U8.13 30.316,30.251 30.909,30.845 L2.1 33.382,30.845 33.767,31.229 L1.1
NetL2_2: L2.2 L3.1 U8.12 | length 5.2
  SignalTop w0.3: U8.12 31.685,29.751 L2.2@31.979,30.045 ; L2.2 L2.2@31.979,30.045 ; L3.1 32.957,29.067 L2.2@31.979,30.045
NetQ1_1: Q1.1 U12.20 | length 25.4
  SignalTop w0.3: Q1.1 4.617,34.766 5.836,35.986 v1(5.991,35.986) ; U12.20 16.318,34.68 18.263,36.625 v1(18.263,41.25)
  SingalBottom w0.3: v1(5.991,35.986) 6.086,35.986 6.244,36.144 13.157,36.144 v1(18.263,41.25)
NetQ1_2: J7.4 Q1.2 | length 8.3
  SignalTop w0.5: v1(2.845,32.893) 2.873,32.864 2.873,32.716 3.367,32.222 Q1.2
  SingalBottom w0.5: v1(2.845,32.893) 2.845,35.077 5.032,37.264 5.032,37.975 J7.4
NetQ2_1: Q2.1 U12.21 | length 23.3
  SignalTop w0.3: v1@3.178,26.032 3.871,26.032 Q2.1@4.417,25.486 ; U12.21 15.518,35.203 v1(16.307,35.992)
  SignalTop w0.5: v1(3.15,26.06) v1@3.178,26.032 ; Q2.1@4.417,25.486 Q2.1
  SingalBottom w0.3: v1(3.15,26.06) 3.15,28.727 8.661,34.239 14.554,34.239 v1(16.307,35.992)
NetQ2_2: J10.1 Q2.2 | length 5
  SignalTop w0.5: Q2.2 4.617,22.434 J10.1
NetQ3_1: Q3.1 U12.22 | length 24.5
  SignalTop w0.3: v1(2.718,30.556) 3.445,29.829 4.592,29.829 Q3.1 ; U12.22 14.718,35.698 v1(16.866,37.846)
  SingalBottom w0.3: v1(2.718,30.556) 7.62,35.458 13.64,35.458 16.027,37.846 v1(16.866,37.846)
NetQ3_2: J15.1 Q3.2 | length 11.3
  SignalTop w0.5: J15.1 1.626,21.361 1.626,26.949 2.581,27.904 Q3.2
NetQ4_1: Q4.1 U12.25 | length 38.7
  SignalTop w0.3: U12.25 11.674,32.15 12.84,32.15 13.088,31.902 v1(13.183,31.902) ; Q4.1 38.091,20.244 v1(39.446,20.244)
  SingalBottom w0.3: v1(13.183,31.902) 13.818,31.267 13.818,29.997 18.237,25.578 21.082,25.578 22.047,24.613 22.047,20.726 23.393,19.38 33.528,19.38 35.306,21.158 36.557,21.158 37.472,20.244 v1(39.446,20.244)
NetQ4_3: J9.2 Q4.3 | length 2.6
  SignalTop w1.3: Q4.3 37.059,17.704 J9.2
NetR1_2: R1.2 U1.5 | length 8.9
  SignalTop w0.3: U1.5 26.182,16.269 26.651,16.739 v1(26.746,16.739) ; R1.2 28.317,13.551 29.636,13.551 29.903,13.818 v1(29.997,13.818)
  SingalBottom w0.3: v1(26.746,16.739) 26.746,15.037 27.178,14.605 29.21,14.605 v1(29.997,13.818)
NetR2_1: R2.1 R6.2 U1.4 | length 4.7
  SignalTop w0.3: R6.2 R2.1 ; R2.1@21.068,13.969 22.877,13.969 23.678,14.769 U1.4
NetR7_2: R7.2 U3.2 | length 2.3
  SignalTop w0.3: R7.2 22.814,8.867 U3.2
NetR8_2: R8.2 U3.3 | length 4.4
  SignalTop w0.3: U3.3 23.607,8.367 23.292,8.052 23.292,6.807 23.978,6.121 R8.2
NetR9_2: D4.1 R9.2 | length 2.9
  SignalTop w0.3: R9.2 27,4.343 27.349,4.692 D4.1
NetR10_2: R10.2 U3.6 | length 5.4
  SignalTop w0.3: U3.6 28.946,8.367 30.675,6.637 30.675,6.216 30.701,6.191 R10.2
NetR11_2: R11.2 U3.7 | length 7.8
  SignalTop w0.3: U3.7 30.681,8.867 32.614,6.934 R11.2
NetR12_2: R12.2 U8.16 | length 2.8
  SignalTop w0.25: U8.16 28.722,32.201 29.689,33.169 29.689,33.744 R12.2
NetR14_1: R14.1 U12.31 | length 3.9
  SignalTop w0.3: R14.1@9.5,24.805 9.5,25.933 10.845,27.279 11.603,27.279 U12.31
NetR15_1: R15.1 S13.3 | length 7.7
  SignalTop w0.3: S13.3 32.078,43.521 R15.1
NetU1_7: J5.2 U1.7 | length 11.3
  SignalTop w0.3: U1.7 26.107,15.269 26.111,15.265
  SignalTop w1.3: 27.28,15.265 31.039,15.265 J5.2
NetU3_5: D4.2 U3.5 | length 2.6
  SignalTop w0.3: U3.5 26.744,7.867 27.454,7.156 27.454,7.152 D4.2
NetU7_2: J7.2 U12.29 | length 11.6
  SignalTop w0.3: J7.2 10.063,37.926 10.063,37.485 9.5,36.922 9.5,29.119 9.675,28.943 U12.29
NetU7_3: J7.3 U12.30 | length 13
  SignalTop w0.3: J7.3 8.915,36.932 8.915,28.55 9.322,28.143 U12.30
NetU8_1: U8.1 U12.27 | length 14.9
  SignalTop w0.3: U12.27 15.507,30.543 v1(16.104,31.14) ; v1(22.327,32.664) 22.352,32.664 23.765,31.251 U8.1
  SingalBottom w0.3: v1(16.104,31.14) 20.723,31.14 22.247,32.664 v1(22.327,32.664)
NetU8_3: U8.3 U12.11 | length 9
  SignalTop w0.3: U12.11 21.514,28.143 v1(22.098,27.559) ; v1(22.022,30.963) 22.733,30.251 U8.3
  SingalBottom w0.3: v1(22.022,30.963) 22.06,30.924 22.06,27.597 v1(22.098,27.559)
NetU8_4: U8.4 U12.13 | length 4.9
  SignalTop w0.3: U12.13@20.176,29.751 U8.4
NetU8_5: U8.5 U12.12 | length 5
  SignalTop w0.3: U12.12 22.416,28.943 22.724,29.251 U8.5
NetU8_6: U8.6 U12.28 | length 17
  SignalTop w0.3: U12.28 11.768,29.643 12.368,29.643 12.903,29.108 v1(16.231,29.108) ; v1(23.597,26.721) 25.177,28.301 U8.6
  SingalBottom w0.3: v1(16.231,29.108) 16.269,29.108 16.904,29.743 17.577,29.743 20.803,26.518 23.299,26.518 23.502,26.721 v1(23.597,26.721)
NetU10_2: J10.2 U12.8 | length 17.2
  SignalTop w0.3: U12.8 19.4,25.093 19.821,24.672 19.821,24.324 v1(19.888,24.257)
  SingalBottom w0.3: J10.2 8.585,17.17 12.116,20.701 16.358,20.701 19.888,24.232 v1(19.888,24.257)
NetU10_3: J10.3 U12.9 | length 22.2
  SignalTop w0.3: U12.9@20.518,26.543 U12.9 20.268,26.443 21.08,26.443 21.26,26.264 21.26,23.089 v1(20.676,22.504)
  SingalBottom w0.3: J10.3 8.331,14.63 10.363,16.662 13.183,16.662 18.999,22.479 20.65,22.479 v1(20.676,22.504)
NetU12_6: J15.2 U12.6 | length 18.8
  SignalTop w0.3: v1(17.018,23.317) 17.068,23.367 17.068,25.044 U12.6
  SingalBottom w0.3: J15.2 5.182,19.075 5.182,20.32 5.664,20.803 10.414,20.803 12.929,23.317 v1(17.018,23.317)
NetU12_7: J15.3 U12.7 | length 25.3
  SignalTop w0.3: U12.7 17.936,25.075 17.936,23.119 v1(19.894,21.162)
  SingalBottom w0.3: J15.3 4.496,13.411 11.024,13.411 19.063,21.451 19.604,21.451 v1(19.894,21.162)
NetU12_19: S13.1 U12.19 | length 10.5
  SignalTop w0.3: U12.19 17.218,33.693 17.218,34.54 v1(19.787,37.109)
  SingalBottom w0.3: v1@19.787,37.13 v1(19.787,37.109) 21.911,37.109 S13.1@24.551,39.749
NetU12_23: J17.2 U12.23 | length 9.7
  SignalTop w0.3: U12.23 13.918,35.685 15.342,37.109 J17.2
NetU12_24: J17.4 U12.24 | length 10.4
  SignalTop w0.3: J17.4 12.802,41.427 14.58,39.649 14.58,37.363 13.118,35.901 U12.24
SHIELD: C3.1 J1.SHIELD R3.2 | length 7.5
  SignalTop w0.5: R3.2 17.17,11.009 18.709,11.009 18.72,10.998 v1(18.847,10.998)
  SingalBottom w0.5: v1(18.847,10.998) 19.607,10.238 J1.SHIELD@19.607,7.293
pads on no net: J5.3 J17.6 J17.7 J17.8 S13.2 S13.4 U2.5 U8.2 U14.1

## Polygon pours and split planes (outlines as drawn)
GND on SignalTop "GND_L01_P031" (solid, remove dead copper, pour order 31): 0,0 43.053,0 43.053,55.55 0,55.55
NetU1_7 on SignalTop "NETU1_7_L01_P018" (solid, remove dead copper, pour order 18): 25.552,15.139 25.552,15.391 26.161,15.437 27.153,15.85 27.153,14.681 26.161,15.094
NetD2_1 on SignalTop "NETD2_1_L01_P030" (solid, remove dead copper, pour order 30): 27.417,17.628 26.035,17.628 24.917,16.65 24.308,16.65 24.308,18.186 27.417,18.186
5VBUS on SignalTop "5VBUS_L01_P017" (solid, remove dead copper, pour order 17): 23.673,15.426 23.673,15.121 22.809,15.121 22.073,14.986 22.073,15.57 22.809,15.426
NetD2_1 on SignalTop "NETD2_1_L01_P002" (solid, remove dead copper, pour order 2): 20.218,17.628 23.19,17.628 24.308,16.65 24.917,16.65 24.917,18.186 20.218,18.186
3V3BUS on Power "3V3BUS_L03_P025" (solid, remove dead copper, pour order 25): 1.753,13.538 1.753,46.66 28.448,46.66 28.448,32.69 28.219,32.461 19.634,32.461 19.634,13.538
5VBUS on Power "5VBUS_L03_P024" (solid, remove dead copper, pour order 24): 24.511,12.751 14.637,12.751 12.268,9.981 12.268,3.734 22.57,3.734 24.511,6.056
GND on SingalBottom "GND_L04_P027" (solid, remove dead copper, pour order 27): 0,55.55 43.053,55.55 43.053,0 0,-0.026
GND on Ground "GND_L02_P022" (solid, remove dead copper, pour order 22): 0,55.55 43.053,55.55 43.053,0 0,0

## Keep-outs
Keep-Out Layer:
  the board outline again, w0.25

## Other copper
SignalTop:
  rectangle net GND: 33.172,21.615 33.96,27.229
  region net GND: 33.172,22.403 33.172,21.615 41.377,21.615 41.377,22.403
  rectangle net GND: 40.589,34.696 41.377,41.427
  rectangle net GND: 33.172,32.106 33.96,41.427
  region net GND: 41.377,40.64 41.377,41.427 33.172,41.427 33.172,40.64
  region net GND: 41.377,28.346 40.589,28.346 40.589,21.615 41.377,21.615
  pour cut-out: 28.74,26.962 28.74,28.791 28.207,28.791 28.207,27.495
  pour cut-out: 28.74,29.102 27.152,29.102 27.152,28.778 28.74,28.778
  pour cut-out: 26.835,26.98 26.835,29.064 27.368,29.064 27.368,27.47
  pour cut-out: 26.683,25.057 26.683,27.292 26.226,27.292 26.226,26.962 26.226,25.057
  pour cut-out: 26.683,25.057 24.32,25.057 24.32,25.641 26.683,25.641
  pour cut-out: 24.676,25.635 24.676,22.041 24.092,22.041 24.092,25.635
  pour cut-out: 24.092,22.276 31.788,22.276 31.788,21.692 24.092,21.692
  pour cut-out: 31.204,26.098 31.204,22.041 31.788,22.041 31.788,26.098
  pour cut-out: 29.413,25.514 31.572,25.514 31.572,26.098 29.413,26.098
  pour cut-out: 29.324,25.514 29.324,25.921 29.781,25.921 29.781,25.514
  pour cut-out: 28.867,26.352 29.781,26.352 29.781,25.921 28.867,25.921
  pour cut-out: 29.324,27.368 29.324,26.352 28.867,26.352 28.867,27.368
  pour cut-out: 28.664,27.368 29.045,27.368 29.045,26.911 28.664,26.911
Ground:
  pour cut-out: 28.651,27.356 29.032,27.356 29.032,26.899 28.651,26.899
  pour cut-out: 29.312,27.356 29.312,26.34 28.854,26.34 28.854,27.356
  pour cut-out: 28.854,26.34 29.769,26.34 29.769,25.908 28.854,25.908
  pour cut-out: 29.312,25.502 29.312,25.908 29.769,25.908 29.769,25.502
  pour cut-out: 29.4,25.502 31.559,25.502 31.559,26.086 29.4,26.086
  pour cut-out: 31.191,26.086 31.191,22.028 31.775,22.028 31.775,26.086
  pour cut-out: 24.079,22.263 31.775,22.263 31.775,21.679 24.079,21.679
  pour cut-out: 24.663,25.622 24.663,22.028 24.079,22.028 24.079,25.622
  pour cut-out: 26.67,25.044 24.308,25.044 24.308,25.629 26.67,25.629
  pour cut-out: 26.67,25.044 26.67,27.28 26.213,27.28 26.213,26.949 26.213,25.044
  pour cut-out: 26.822,26.968 26.822,29.051 27.356,29.051 27.356,27.457
  pour cut-out: 28.727,29.089 27.139,29.089 27.139,28.765 28.727,28.765
  pour cut-out: 28.727,26.949 28.727,28.778 28.194,28.778 28.194,27.483

## Silkscreen, mask and mechanical layers (free items; w line width, h text height)
Top Solder:
  rectangle: 33.172,32.106 33.96,41.427
  region: 41.377,40.64 41.377,41.427 33.172,41.427 33.172,40.64
  rectangle: 40.589,34.696 41.377,41.427
  region: 41.377,28.346 40.589,28.346 40.589,21.615 41.377,21.615
  region: 33.172,22.403 33.172,21.615 41.377,21.615 41.377,22.403
  rectangle: 33.172,21.615 33.96,27.229
  lines w0.25: 33.528,41.021 33.553,41.021 ; 33.553,22.022 33.604,22.022 ; 33.553,22.047 33.604,22.047 33.579,22.022 ; 40.945,22.022 40.97,22.022 ; 40.945,41.021 40.97,41.021 ; 33.553,25.578 33.604,25.578 33.553,25.578